# Altium PCB paizhen.PcbDoc
Units mil, origin at the board's own origin, x right, y up, seen from the top; angles counter-clockwise.
Board outline 6000 x 4000 mil, 2 copper layers (Top Layer, Bottom Layer); 4 components, 8 nets, 64 pads, 0 vias.
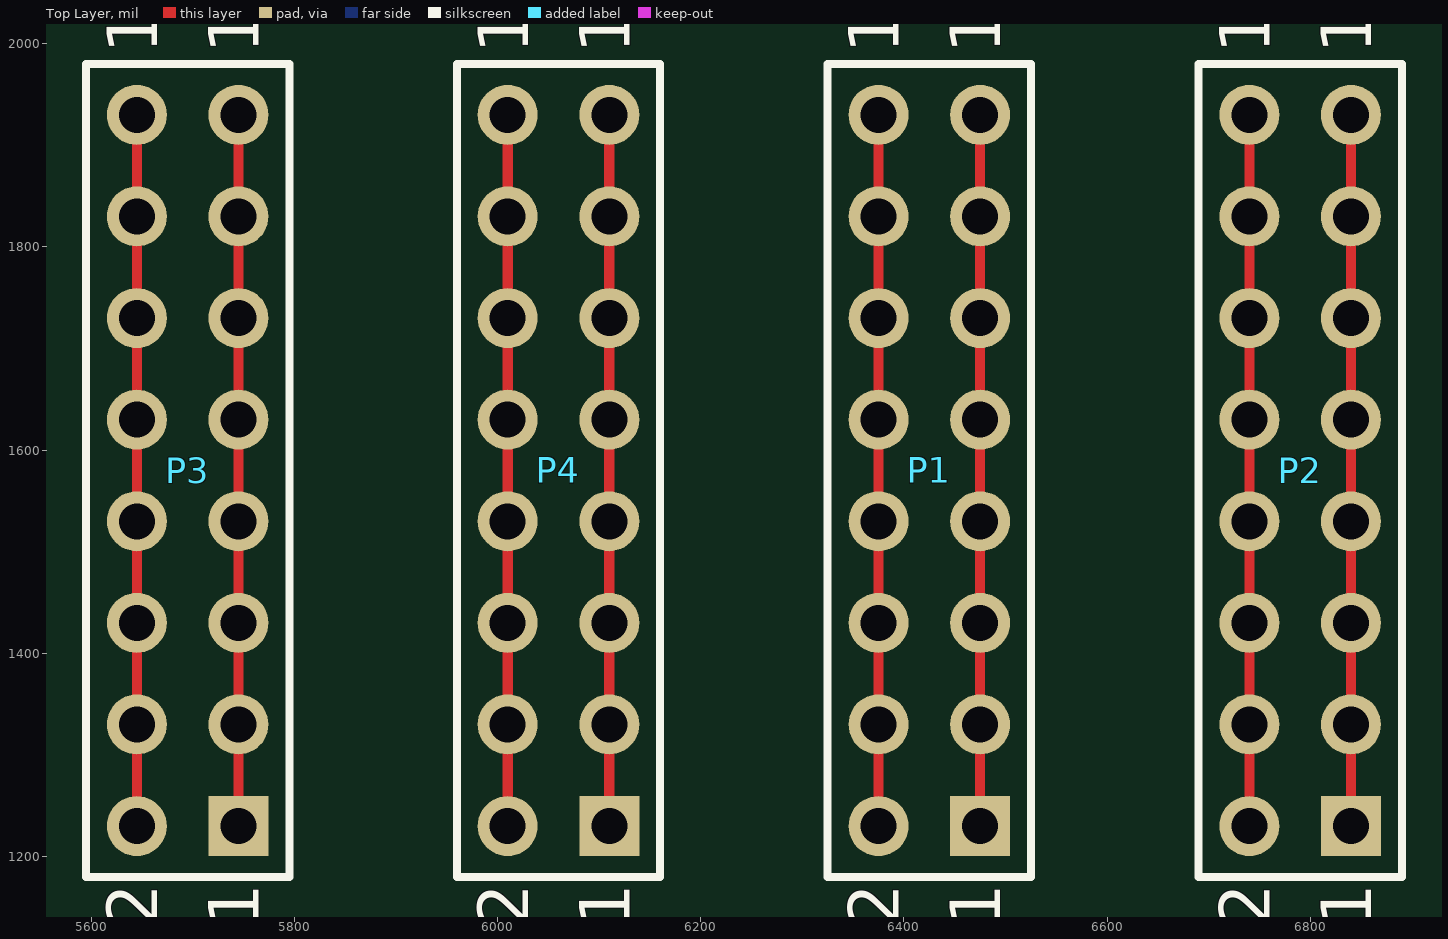
[diagram p0: Top Layer view]
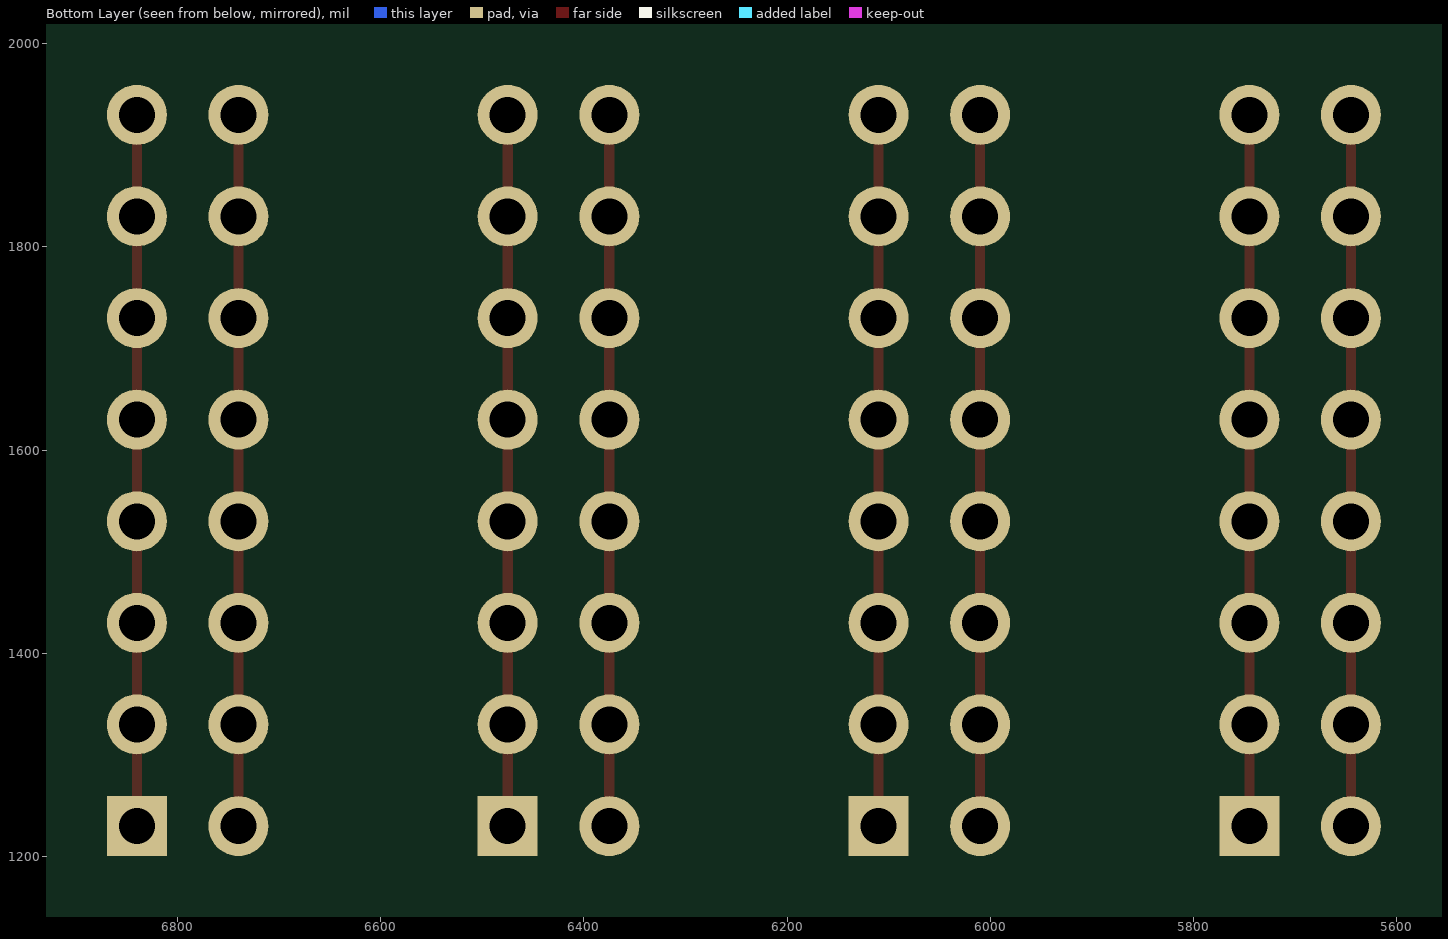
[diagram p1: Bottom Layer view, seen from below]

## Layer stack, top to bottom
Top Solder: solder mask 0.4, Solder Resist, Dk 3.5
Top Layer: signal copper 1.4
Dielectric 1: dielectric 12.6, FR-4, Dk 4.8
Bottom Layer: signal copper 1.4
Bottom Solder: solder mask 0.4, Solder Resist, Dk 3.5

## Board outline
1000,1000 7000,1000 7000,5000 1000,5000

## Design rules (kind name [scope] priority, off if disabled: settings)
Clearance [All] p1: gap=10
PolygonConnect [All] p1: connectstyle=Relief reliefconductorwidth=10 reliefentries=4 polygonreliefangle="90 Angle" airgapwidth=10
RoutingVias [All] p1: holewidth=28 width=50 viastyle="Through Hole" minholewidth=28 minwidth=50 maxholewidth=28 maxwidth=50
SolderMaskExpansion [All] p1: expansion=4
Width [All] p1: maxlimit=10 minlimit=10 preferedwidth=10
30 further rules are at their usual default settings.

## Components (designator, comment, footprint, x,y, rotation, side; value= is the part's Value field where it differs from the comment)
P1 "Header 8X2" HDR2X8 6475,1230 r90 top
P2 "Header 8X2" HDR2X8 6840,1230 r90 top
P3 "Header 8X2" HDR2X8 5745,1230 r90 top
P4 "Header 8X2" HDR2X8 6110,1230 r90 top

## Footprints (in the part's own frame and the unit in brackets; to place one, negate y for a bottom-side part, rotate by r counter-clockwise, add the part's x,y. Pads: shape width x height; smd on the part's side, far side on the other; paste and mask are expansions set on the pad)
HDR2X8 [mm] "Connector; Header; 8x2 Position"
  rect 1.5x1.5 hole 0.9: 1(0,0)
  round 1.5 hole 0.9: 2(0,2.54) 3(2.54,0) 4(2.54,2.54) 5(5.08,0) 6(5.08,2.54) 7(7.62,0) 8(7.62,2.54) 9(10.16,0) 10(10.16,2.54) 11(12.7,0) 12(12.7,2.54) 13(15.24,0) 14(15.24,2.54) 15(17.78,0) 16(17.78,2.54)
  silkscreen extent -1.27,-1.27 19.05,3.81

## Part data
P1 P2 P3 P4: "Header, 8-Pin, Dual row"

## Nets (pads, with @x,y where several pads share a name; then routed paths per layer and width w, separated by ;. In a path a pad name is that pad's centre, name@x,y a point inside that pad or via, vN(x,y) a via of type N, cw(c..) or ccw(c..) an arc to the next point about the centre after c; other vN are vias at no path point)
NetP1_1: P1.1 P1.3 P1.5 P1.7 P1.9 P1.11 P1.13 P1.15 | length 700
  Top Layer w10: P1.1 P1.3 P1.5 P1.7 P1.9 P1.11 P1.13 P1.15
NetP1_2: P1.2 P1.4 P1.6 P1.8 P1.10 P1.12 P1.14 P1.16 | length 700
  Top Layer w10: P1.2 P1.4 P1.6 P1.8 P1.10 P1.12 P1.14 P1.16
NetP2_1: P2.1 P2.3 P2.5 P2.7 P2.9 P2.11 P2.13 P2.15 | length 700
  Top Layer w10: P2.1 P2.3 P2.5 P2.7 P2.9 P2.11 P2.13 P2.15
NetP2_2: P2.2 P2.4 P2.6 P2.8 P2.10 P2.12 P2.14 P2.16 | length 700
  Top Layer w10: P2.2 P2.4 P2.6 P2.8 P2.10 P2.12 P2.14 P2.16
NetP3_1: P3.1 P3.3 P3.5 P3.7 P3.9 P3.11 P3.13 P3.15 | length 700
  Top Layer w10: P3.1 P3.3 P3.5 P3.7 P3.9 P3.11 P3.13 P3.15
NetP3_2: P3.2 P3.4 P3.6 P3.8 P3.10 P3.12 P3.14 P3.16 | length 700
  Top Layer w10: P3.2 P3.4 P3.6 P3.8 P3.10 P3.12 P3.14 P3.16
NetP4_1: P4.1 P4.3 P4.5 P4.7 P4.9 P4.11 P4.13 P4.15 | length 700
  Top Layer w10: P4.1 P4.3 P4.5 P4.7 P4.9 P4.11 P4.13 P4.15
NetP4_2: P4.2 P4.4 P4.6 P4.8 P4.10 P4.12 P4.14 P4.16 | length 700
  Top Layer w10: P4.2 P4.4 P4.6 P4.8 P4.10 P4.12 P4.14 P4.16

## Text inside footprints (layer, text, board x,y; h text height)
P1: Top Overlay "2" at 6395,1130 h50 r90; Top Overlay "1" at 6495,1130 h50 r90; Top Overlay "15" at 6495,1990 h50 r90; Top Overlay "16" at 6395,1990 h50 r90
P2: Top Overlay "2" at 6760,1130 h50 r90; Top Overlay "1" at 6860,1130 h50 r90; Top Overlay "15" at 6860,1990 h50 r90; Top Overlay "16" at 6760,1990 h50 r90
P3: Top Overlay "2" at 5665,1130 h50 r90; Top Overlay "1" at 5765,1130 h50 r90; Top Overlay "15" at 5765,1990 h50 r90; Top Overlay "16" at 5665,1990 h50 r90
P4: Top Overlay "2" at 6030,1130 h50 r90; Top Overlay "1" at 6130,1130 h50 r90; Top Overlay "15" at 6130,1990 h50 r90; Top Overlay "16" at 6030,1990 h50 r90